# Altium PCB Waistband.PcbDoc (part 2 of 2)
Units mil, origin at the board's own origin, x right, y up, seen from the top; angles counter-clockwise.
Board outline 3000 x 2000 mil, 2 copper layers (Top Layer, Bottom Layer); 52 components, 62 nets, 323 pads, 99 vias.
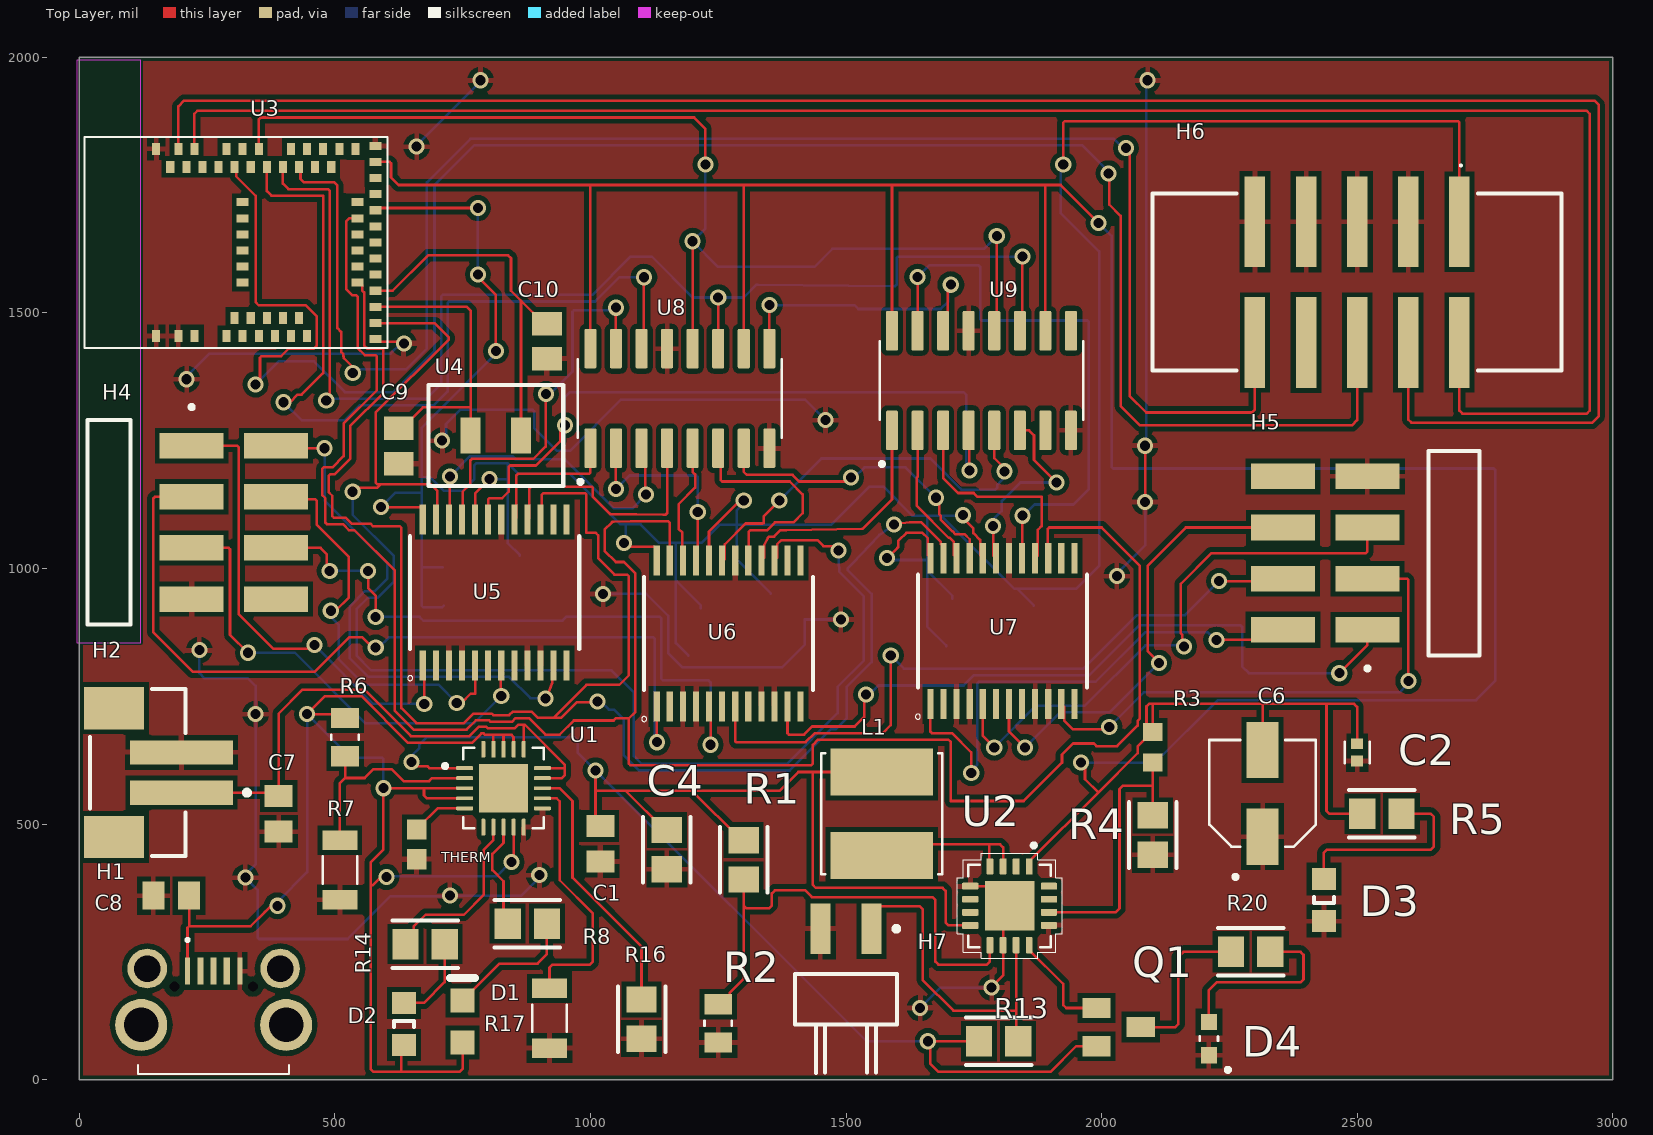
[diagram p0: Top Layer view]

## Part data (continued)
R7 R17: library part RE1206FRE07100KL, "Chip Resistor Precision Grade Thick Film 1206 100kOhm 1% Paper T/R", Case/Package=1206, Manufacturer=Yageo, Max Operating Temperature=155°C, Max Power Dissipation=250mW, Min Operating Temperature=-55°C, Resistance=100kR, Resistor Type="Thick Film", Supplier Part Number 1=13-RE1206FRE07100KLCT-ND, Temperature Coefficient=50ppm/°C, Tolerance=1%, Category="Chip SMD Resistors", ComponentLink1Description=http://www.yageo.com/NewPortal/yageodocoutput?fileName=/pdf/R-Chip/PYu-RE_105_RoHS_L_4.pdf&src-supplier=Digi-Key, ComponentLink1URL=http://www.yageo.com/NewPortal/yageodocoutput?fileName=/pdf/R-Chip/PYu-RE_105_RoHS_L_4.pdf&src-supplier=Digi-Key, Features="Moisture Resistant", Height=0.026inch, Length=0.122inch, Manufacturer Part Number=RE1206FRE07100KL, Number of Terminations=2, Packaging="Tape and Reel", Pricing 1="1=0.10000, 10=0.06800, 100=0.02750, 1000=0.01234, 2500=0.01071 (USD)", RoHS=Yes, RoHS Compliant=Yes, Stock 1=11020, Supplier 1=Digi-Key, Width=0.063inch
THERM: library part NCP18XW153J03RB, "Thermistor NTC 15K Ohm 5% 2-Pin 0603 Surface Mount Solder Pad 3987K Paper T/R", Case Code (Imperial)=0603, Case Code (Metric)=1608, Current Rating=250uA, Manufacturer=Murata, Max Operating Temperature=125°C, Max Power Dissipation=100mW, Min Operating Temperature=-40°C, Package Quantity=4000, Resistance=15kR, Resistance Tolerance=5%, Supplier Part Number 1=490-2444-1-ND, Accuracy=3%, Case/Package=0603, Category=Thermistors, ComponentLink1Description=https://datasheet.ciiva.com/11822/0900766b80a00379-11822042.pdf?src-supplier=RSComponents, ComponentLink1URL=https://datasheet.ciiva.com/11822/0900766b80a00379-11822042.pdf?src-supplier=RSComponents, ComponentLink2Description=https://datasheet.ciiva.com/2848/r44e-2848415.pdf?src-supplier=Digi-Key, ComponentLink2URL=https://datasheet.ciiva.com/2848/r44e-2848415.pdf?src-supplier=Digi-Key, ComponentLink3Description=https://datasheet.ciiva.com/2848/r44e-2848416.pdf?src-supplier=Digi-Key, ComponentLink3URL=https://datasheet.ciiva.com/2848/r44e-2848416.pdf?src-supplier=Digi-Key, ComponentLink4Description=https://datasheet.ciiva.com/2848/r44e-2848417.pdf?src-supplier=Digi-Key, ComponentLink4URL=https://datasheet.ciiva.com/2848/r44e-2848417.pdf?src-supplier=Digi-Key, ComponentLink5Description=https://datasheet.ciiva.com/18225/getdatasheetpartid-325542-18225670.pdf?src-supplier=Verical, ComponentLink5URL=https://datasheet.ciiva.com/18225/getdatasheetpartid-325542-18225670.pdf?src-supplier=Verical, Depth=0.8mm, Height=0.8mm, Lead Free="Lead Free", Length=1.6mm, Manufacturer Part Number=NCP18XW153J03RB, Mount="Surface Mount", Number of Pins=2, Packaging="Tape and Reel", Power Rating=100mW, Pricing 1="1=0.25000, 5=0.22800, 10=0.20300, 25=0.18160, 50=0.15960, 100=0.13610, 500=0.11258, 1000=0.09425 (USD)", Radiation Hardening=No, RoHS=Yes, RoHS Compliant=Yes, Series=NCP18, Stock 1=19442, Supplier 1=Digi-Key, Termination=SMD/SMT, Thickness=150um, Tolerance=5%, Width=800um
U1: "MCP73871 Series Li-Ion/Li-Pol 50 mA - 1000 mA 4.2 V Battery Charger - QFN-20", Case/Package=QFN, Manufacturer=Microchip, Max Charge Current=1A, Max Input Voltage=6V, Max Operating Temperature=85°C, Min Operating Temperature=-40°C, Min Supply Voltage=4.5V, Output Voltage=4.2V, Package Quantity=91, Supplier Part Number 1=MCP73871-2CCI/ML-ND, Category="Battery Management", ComponentLink1Description=https://datasheet.ciiva.com/16296/filehandler-aspxddocname-en536709-16296680.pdf?src-supplier=Future+Electronics, ComponentLink1URL=https://datasheet.ciiva.com/16296/filehandler-aspxddocname-en536709-16296680.pdf?src-supplier=Future+Electronics, ComponentLink2Description=https://datasheet.ciiva.com/3213/22090b-3213433.pdf?src-supplier=Avnet, ComponentLink2URL=https://datasheet.ciiva.com/3213/22090b-3213433.pdf?src-supplier=Avnet, ComponentLink3Description=https://datasheet.ciiva.com/1933/22090b-1933110.pdf?src-supplier=Digi-Key, ComponentLink3URL=https://datasheet.ciiva.com/1933/22090b-1933110.pdf?src-supplier=Digi-Key, ComponentLink4Description=https://datasheet.ciiva.com/1137/1669447-1137947.pdf?src-supplier=Element14, ComponentLink4URL=https://datasheet.ciiva.com/1137/1669447-1137947.pdf?src-supplier=Element14, ComponentLink5Description=https://datasheet.ciiva.com/15114/getdatasheetpartid-448150-15114746.pdf?src-supplier=Verical, ComponentLink5URL=https://datasheet.ciiva.com/15114/getdatasheetpartid-448150-15114746.pdf?src-supplier=Verical, Contact Plating=Tin,Matte, Height=0.95mm, Lead Free="Lead Free", Length=4mm, Manufacturer Part Number=MCP73871-2CCI/ML, Max Output Current=1A, Max Supply Voltage=6V, Mount="Surface Mount", Number of Cells=1, Number of Pins=20, Output Current=1A, Packaging=Rail/Tube, Pricing 1="1=2.19000, 25=1.82320, 100=1.68000 (USD)", Radiation Hardening=No, REACH SVHC="No SVHC", RoHS=Yes, RoHS Compliant=Yes, Supplier 1=Digi-Key, Width=4mm
U2: "Conv DC-DC 1.8V to 5.5V Synchronous Step Up Single-Out 1.8V to 5.5V 0.5A 16-Pin VQFN EP T/R", Case/Package=QFN, Manufacturer="Texas Instruments", Max Input Voltage=5.5V, Max Operating Temperature=85°C, Max Output Current=500mA, Min Input Voltage=1.8V, Min Operating Temperature=-40°C, Output Current=2A, Package Quantity=1, Quiescent Current=20uA, Supplier Part Number 1=296-15259-6-ND, Switching Frequency=600kHz, Category="Voltage Regulators - Switching", ComponentLink1Description=https://datasheet.ciiva.com/3221/tps61092-3221395.pdf?src-supplier=Avnet, ComponentLink1URL=https://datasheet.ciiva.com/3221/tps61092-3221395.pdf?src-supplier=Avnet, ComponentLink2Description=https://datasheet.ciiva.com/15113/getdatasheetpartid-188313-15113725.pdf?src-supplier=Verical, ComponentLink2URL=https://datasheet.ciiva.com/15113/getdatasheetpartid-188313-15113725.pdf?src-supplier=Verical, ComponentLink3Description=https://datasheet.ciiva.com/26901/tps61090rsar-26901797.pdf?src-supplier=IIIC, ComponentLink3URL=https://datasheet.ciiva.com/26901/tps61090rsar-26901797.pdf?src-supplier=IIIC, ComponentLink4Description=https://datasheet.ciiva.com/2025/tps61090-2025960.pdf?src-supplier=Digi-Key, ComponentLink4URL=https://datasheet.ciiva.com/2025/tps61090-2025960.pdf?src-supplier=Digi-Key, ComponentLink5Description=https://datasheet.ciiva.com/2025/tps61090-2025959.pdf?src-supplier=Digi-Key, ComponentLink5URL=https://datasheet.ciiva.com/2025/tps61090-2025959.pdf?src-supplier=Digi-Key, ComponentLink6Description=https://datasheet.ciiva.com/2025/tps61090-2025961.pdf?src-supplier=Digi-Key, ComponentLink6URL=https://datasheet.ciiva.com/2025/tps61090-2025961.pdf?src-supplier=Digi-Key, Efficiency=96%, Height=0.9mm, Lead Free="Lead Free", Length=4mm, Manufacturer Part Number=TPS61090RSAR, Max Output Voltage=5.5V, Min Output Voltage=1.8V, Mount="Surface Mount", Number of Outputs=1, Number of Pins=16, Operating Supply Voltage=5.5V, Output Configuration=Positive, Output Type=Adjustable, Output Voltage=5.5V, Packaging="Tape and Reel", Pricing 1="1=2.72000, 10=2.44700, 25=2.30800, 100=1.96650, 250=1.84652, 500=1.61570, 1000=1.52425 (USD)", Radiation Hardening=No, RoHS=Yes, RoHS Compliant=Yes, Supplier 1=Digi-Key, Synchronous Rectifier=Yes, Topology=Boost, Weight=0.001464oz, Width=4mm
U4: "Crystal 0.032768MHz ±20ppm (Tol) 9pF FUND 70000Ohm 2-Pin CSMD T/R", Case/Package=SMD/SMT, ESR (Equivalent Series Resistance)=70kR, Frequency=32.768kHz, Frequency Stability=20ppm, Load Capacitance=9pF, Manufacturer=Epson, Max Operating Temperature=85°C, Min Operating Temperature=-40°C, Package Quantity=1000, Supplier Part Number 1="FC-135 32.7680KA-AC0", Category=Uncategorized, ComponentLink1Description=http://www.mouser.com/ds/2/137/1699449-465441.pdf?src-supplier=Mouser, ComponentLink1URL=http://www.mouser.com/ds/2/137/1699449-465441.pdf?src-supplier=Mouser, ComponentLink2Description=http://components.arrow.com/part/dataview/43474691S8880657N1318?src-supplier=Arrow+Electronics, ComponentLink2URL=http://components.arrow.com/part/dataview/43474691S8880657N1318?src-supplier=Arrow+Electronics, ComponentLink3Description=https://www.verical.com/server-webapp/html/getDatasheet?partID=654709&src-supplier=Verical, ComponentLink3URL=https://www.verical.com/server-webapp/html/getDatasheet?partID=654709&src-supplier=Verical, ComponentLink4Description=https://support.epson.biz/td/api/doc_check.php?dl=brief_FC-135&lang=en&src-supplier=Digi-Key, ComponentLink4URL=https://support.epson.biz/td/api/doc_check.php?dl=brief_FC-135&lang=en&src-supplier=Digi-Key, ComponentLink5Description=https://support.epson.biz/td/api/doc_check.php?dl=brief_FC-135R_en.pdf&src-supplier=Digi-Key, ComponentLink5URL=https://support.epson.biz/td/api/doc_check.php?dl=brief_FC-135R_en.pdf&src-supplier=Digi-Key, Drive Level=0.5uW, Frequency Tolerance=20ppm, Height=0.035inch, Length=0.126inch, Manufacturer Part Number=FC13532.7680KAAC0, Mount="Surface Mount", Packaging="Tape and Reel", Radiation Hardening=No, RoHS=Yes, Series=FC-135, Supplier 1="Arrow Electronics", Termination=SMD/SMT, Tolerance=20ppm, Weight=0.000564oz, Width=0.059inch
U5 U6 U7: "DC Motor Driver 2.7V to 5.5V 24-Pin SSOP Embossed T/R", Case/Package=SSOP, Manufacturer=Toshiba, Max Operating Temperature=85°C, Max Supply Voltage=5.5V, Min Operating Temperature=-20°C, Min Supply Voltage=2.7V, Operating Supply Voltage=3V, Output Current=1A, Package Quantity=1, Category="Motor Drivers", ComponentLink1Description=https://datasheet.ciiva.com/12216/tb6612fng-datasheet-en-20141001-12216529.pdf?src-supplier=Mouser, ComponentLink1URL=https://datasheet.ciiva.com/12216/tb6612fng-datasheet-en-20141001-12216529.pdf?src-supplier=Mouser, Interface=Parallel, Logic Function="AND GATE", Manufacturer Part Number=TB6612FNG,C,8,EL, Mount="Surface Mount", Number of Outputs=2, Number of Pins=24, Packaging="Tape and Reel", Pricing 1="1=2.06000, 10=1.85400, 25=1.74880, 100=1.49010, 250=1.39920, 500=1.22430, 1000=1.01442 (USD)", RoHS=Yes, Series=-, Supplier 1=Digi-Key
U8 U9: "No Description Available", Mfr_Name="Texas Instruments", Copyright="Copyright (C) 2022 Ultra Librarian. All rights reserved.", Manufacturer_Part_Number=SN74HC595D, RefDes=RefDes, Type=DEV

## Via types
v1: diameter 31.5, hole 19.68, Top Layer to Bottom Layer, 99 vias

## Nets (pads, with @x,y where several pads share a name; then routed paths per layer and width w, separated by ;. In a path a pad name is that pad's centre, name@x,y a point inside that pad or via, vN(x,y) a via of type N, cw(c..) or ccw(c..) an arc to the next point about the centre after c; other vN are vias at no path point)
Enable_control: H7.1 R13.1 U2.11 | length 673.8
  Top Layer w5: H7.1 1550,324.53 1564.69,339.21 1604.39,339.21 1604.43,339.25 1644.14,339.25 1650,333.39 1650,195 1710,135 1832.8,135 ; U2.11 1832.8,135 ; R13.1 1832.8,79.06 1832.8,135
FB_U2: R3.1 R4.2 U2.14 | length 532.4
  Top Layer w5: U2.14 2027.2,327.2 2035,335 2035,568.31 2041.73,575.04 2100,575.04 ; R4.2@2100,530 2100,575.04 ; R3.1 2100,575.04
GND: C1.1 C2.1 C4.1 C6.1 C7.1 C8.1 C9.1 C10.1 C11.1 C12.1 C13.1 C14.1 C15.1 C16.1 C17.1 C18.1 C19.1 D3.1 D4.C H1.5 H2.2 H4.07 H5.07 H6.3 H6.5 H6.7 H6.9 H7.2 R2.1 R4.1 R7.1 R16.1 R17.1 THERM.1 U1.10 U1.11 U2.5 U2.10 U2.13 U2.17 U3.1 U3.2 U3.15 U3.33 U3.55 U5.3 U5.4 U5.9 U5.10 U5.18 U6.3 U6.4 U6.9 U6.10 U6.18 U7.3 U7.4 U7.9 U7.10 U7.18 U8.8 U8.13 U9.8 U9.13 | length 4947.4
  Top Layer w5: U3.15 584.98,1443.29 631.71,1443.29 v1(635,1440) ; U2.5 1781.61,378.39 U2.17 1807.2,327.2 1807.2,275.2 1807,275 1807.2,274.8 U2.10 1807.2,203.76 1785,181.55 v1(1785,180) ; U2.13@1883.52,300 1885.14,301.61 U2.13 ; v1(2085,1130) v1(2085,1240)
  Bottom Layer w5: v1(210,1370) 210,1375 255,1420 609.04,1420 629.04,1440 v1(635,1440) ; v1(235,840) 235,795 245,785 330,785 345,770 v1(345,715) 345,420.96 325,400.96 v1(325,395) 349.13,370.87 349.13,277.93 352.06,275 525,275 608.88,358.88 723.88,358.88 v1(725,360) 865,360 900,395 v1(900,400) ; v1(660,1825) 660,1827.5 785,1952.5 v1(785,1955) ; v1(710,1250) 717.5,1257.5 717.5,1282.5 745,1310 887.07,1310 890,1307.07 890,1275 935,1230 960,1230 1060,1330 1420,1330 v1(1460,1290) ; v1(1025,950) 1109.28,950 1151.87,907.4 1151.87,834.39 1179.44,806.82 1375.42,806.82 1419,850.39 1419,900 v1(1490,900) ; v1(1645,140) 1685,180 v1(1785,180) ; v1(2030,985) 2030,990 2085,1045 v1(2085,1130) ; v1(2085,1240) 2087.5,1242.5 2087.5,1952.5 v1(2090,1955)
LBI_U2: R1.1 R2.2 U2.9 | length 946.7
  Top Layer w5: R2.2 1257.28,147.4 1272.17,162.28 1272.17,169.57 1299.68,197.09 1299.68,340.86 ; R1.1 1299.68,340.86 ; U2.9 1781.61,230.86 1775.76,225 1680.86,225 1675,230.86 1675,351.27 1669.14,357.13 1433.45,357.13 1420.58,370 1360.86,370 1355,364.14 1355,340.86 1349.14,335 1305.54,335 1299.68,340.86
m0_in: U5.21 U8.15 | length 739.7
  Top Layer w5: U5.21 750,1096.61 750,1150 765,1165 765,1211.26 767.93,1214.19 888.19,1214.19 912.5,1238.5 912.5,1340.65 v1(913.01,1341.16) ; U8.15 v1(1050,1510)
  Bottom Layer w5: v1(913.01,1341.16) 921.16,1341.16 965,1385 965,1502.07 967.93,1505 1045,1505 v1(1050,1510)
m0_out: H4.01 U5.1 | length 937.8
  Top Layer w5: H4.01 309.06,1240 311.99,1237.07 311.99,910.7 380.19,842.5 452.5,842.5 v1(460,850) ; U5.1 672.05,802.95 675,800 v1(675,735)
  Bottom Layer w5: v1(460,850) 575,735 v1(675,735)
m1_in: U5.17 U8.1 | length 282.8
  Top Layer w5: U5.17 855,1099.25 855,1182.07 857.93,1185 997.07,1185 1000,1187.93 U8.1
m1_out: H4.02 U5.11 | length 1085.9
  Top Layer w5: H4.02 389.96,1235 v1(479.63,1235) ; v1(912.51,745.55) 913.48,745.55 913.57,745.63 925,776.43 925,810 U5.11
  Bottom Layer w5: v1(479.63,1235) 480,1234.63 480,1133.03 602.5,1010.53 602.5,979.47 578.41,955.37 559.13,955.37 529.63,925.87 529.63,824.13 565.97,787.79 841.12,787.79 882.5,746.41 911.65,746.41 v1(912.51,745.55)
m2_in: U6.21 U8.2 | length 417.3
  Top Layer w5: v1(1050,1155) U8.2 ; U6.21 1210,1018.98 v1(1210,1110)
  Bottom Layer w5: v1(1050,1155) 1076.77,1181.77 1207.07,1181.77 1210,1178.84 v1(1210,1110)
m2_out: H4.03 U6.1 | length 1671.1
  Top Layer w5: H4.03 147.93,1140 145,1137.07 145,875 222.5,797.5 460.53,797.5 528.03,865 554.04,865 574.04,845 v1(580,845) ; U6.1 1129.69,725.31 1130,725 v1(1130,660)
  Bottom Layer w5: v1(580,845) 585.96,845 605.96,865 1123.2,865 1126.13,862.07 1126.13,663.87 v1(1130,660)
m3_in: U5.22 U8.3 | length 633.1
  Top Layer w5: U5.22 725,1097.2 v1(725,1180) ; U8.3 1107.7,1227.42 1107.7,1145.6 v1(1109.03,1144.27)
  Bottom Layer w5: v1(725,1180) 763.87,1218.87 848.48,1218.87 853.48,1213.87 949.33,1213.87 1045.71,1117.5 1082.27,1117.5 v1(1109.03,1144.27)
m3_out: H4.04 U5.5 | length 810.3
  Top Layer w5: H4.04 389.96,1135 462.07,1135 465,1132.07 465,1085 527.5,1022.5 527.5,943.46 501.17,917.14 v1(492.13,917.14) ; v1(738.49,736.51) 747.48,736.51 765.96,755 774.41,755 U5.5
  Bottom Layer w5: v1(492.13,917.14) 492.13,904.96 507.86,889.22 507.86,822.14 557.5,772.5 702.5,772.5 v1(738.49,736.51)
m4_in: U5.16 U8.4 | length 493.6
  Top Layer w5: U5.16 880,1098.66 880,1155 885,1160 1002.07,1160 1005,1157.07 1005,1140 1038.54,1106.46 1142.93,1105 1147.07,1105 1148.54,1106.46 1150,1107.93 U8.4
m4_out: H4.05 U5.7 | length 927.4
  Top Layer w5: H4.05 292.07,1040 295,1037.07 295,870 v1(330,835) ; v1(825.59,750.29) 825.59,756.91 825,757.5 825,800 825.59,800.59 U5.7
  Bottom Layer w5: v1(330,835) 421.97,835 559.47,697.5 772.8,697.5 v1(825.59,750.29)
m5_in: U6.22 U8.5 | length 238.7
  Top Layer w5: U6.22 1180,1016.3 1180,1070 1172.5,1077.5 1172.5,1125.53 1205,1158.03 1205,1183.84 1200,1188.84 U8.5
m5_out: H4.06 U6.5 | length 1292.2
  Top Layer w5: H4.06 472.07,1040 484.57,1027.5 484.57,1000.43 v1(490,995) ; v1(565,995) 565,961.81 580,946.81 v1(580,905) ; U6.5 1235,727.05 v1(1235,655)
  Bottom Layer w5: v1(490,995) v1(565,995) ; v1(580,905) 665.77,905 672.96,897.82 945.39,897.82 952.57,905 1136.07,905 1139,902.07 1139,783.93 1141.93,781 1231,781 1235,777 v1(1235,655)
m6_in: U6.17 U8.6 | length 439.1
  Top Layer w5: U8.6 1250,1220 1255,1215 1255,1172.93 1257.93,1170 1390,1170 1415,1145 1415,1107.93 1397.16,1090.09 1361.13,1090.09 1346.04,1075 1312.93,1075 1310,1072.07 1310,1027.44 U6.17@1308.82,1026.26
m6_out: H5.01 U6.11 | length 1436.4
  Top Layer w5: U6.11 1385.59,677.93 1388.52,675 1417.86,675 1433.6,690.75 1517.07,690.75 1535.37,709.05 1535.37,749.13 v1(1539.37,753.13) ; v1(2465,795) 2520,850 H5.01
  Bottom Layer w5: v1(1539.37,753.13) 1545.68,753.13 1563.47,770.92 1729.92,770.92 1750.13,791.13 1976.13,791.13 2073.37,888.37 2272.07,888.37 2275,885.44 2275,807.93 2287.93,795 v1(2465,795)
m7_in: U7.21 U8.7 | length 622.4
  Top Layer w5: U8.7 1300,1188.84 1305.96,1182.87 1395.46,1182.87 1408.33,1170 1502.5,1170 v1(1510,1177.5) ; v1(1675.74,1138.2) 1682.5,1131.43 1682.5,1105.7 1685,1103.2 1685,1095.29 1707.52,1072.78 1708.37,1072.78 1714.56,1066.58 1732.49,1066.58 1742.05,1057.03 U7.21
  Bottom Layer w5: v1(1510,1177.5) 1515.96,1177.5 1535.96,1197.5 1616.43,1197.5 v1(1675.74,1138.2)
m7_out: H5.02 U7.1 | length 1025.2
  Top Layer w5: U7.1 1665,734.29 1665,680.8 1667.93,677.87 1707.13,677.87 1745,640 v1(1745,600) ; v1(2225,860.12) 2335.16,860.12 H5.02
  Bottom Layer w5: v1(1745,600) 1745,604.18 1757,616.18 1757,775.32 1759.93,778.25 1988.25,778.25 2085.5,875.5 2207.5,875.5 2222.87,860.12 v1(2225,860.12)
m8_in: U7.17 U9.15 | length 1116.9
  Top Layer w5: U9.15 v1(1640,1570) ; U7.17 1845.07,1020.66 v1(1845.07,1103.08)
  Bottom Layer w5: v1(1640,1570) 1662.76,1592.76 1759.31,1592.76 1762.24,1589.83 1762.24,1487.93 1765.17,1485 1972.07,1485 1975,1482.07 1975,1155 1945,1125 1869.11,1125 1847.18,1103.08 v1(1845.07,1103.08)
m8_out: H5.03 U7.11 | length 1035.4
  Top Layer w5: U7.11 1926.56,729.19 1926.56,702.71 1944.27,685 2005,685 2010,690 v1(2015,690) ; H5.03 2597.07,980 2600,977.07 v1(2600,780)
  Bottom Layer w5: v1(2015,690) 2082.5,757.5 2582.5,757.5 2595,770 2595,775 v1(2600,780)
m9_in: U6.16 U9.1 | length 456.4
  Top Layer w5: U6.16 1339.78,1020.81 1339.78,1045.22 1340.1,1045.88 1340.49,1046.67 ; 1340.49,1046.68 1346.65,1059.32 cw(c1351.15,1057.13) 1351.15,1062.13 1359.18,1062.13 1371.92,1074.87 1383.04,1074.87 ccw(c1383.04,1079.87) 1383.12,1074.87 1532.22,1077.22 1590,1135 U9.1
m9_out: H5.04 U6.7 | length 1374.9
  Top Layer w5: U6.7 1283.23,661.77 1285,660 1421.06,660 1438.94,677.87 1572.07,677.87 1587.5,693.3 v1(1587.5,830) ; v1(2230,975) 2350.04,975 H5.04
  Bottom Layer w5: v1(1587.5,830) 1613.5,804 1965,804 2069.43,908.43 2163.43,908.43 v1(2230,975)
m10_in: U7.22 U9.2 | length 284.3
  Top Layer w5: U9.2 1640.02,1179.1 1638.24,1177.32 1638.24,1122.67 1701,1059.9 1703.04,1059.9 1711.08,1051.86 1711.08,1025.37 U7.22
m10_out: H5.05 U7.5 | length 1112.6
  Top Layer w5: U7.5 1767.64,672.36 v1(1790,650) ; v1(2161.52,847.25) 2157.5,851.27 2157.5,870.5 2155,873 2155,970 2215,1030 2517.07,1030 2520,1032.93 H5.05
  Bottom Layer w5: v1(1790,650) 1871.12,731.12 1967,731.12 2085.47,849.6 2159.17,849.6 v1(2161.52,847.25)
m11_in: U7.16 U9.3 | length 426.5
  Top Layer w5: U9.3 1690,1176.97 1719.47,1147.5 1749.64,1147.5 1756.56,1140.58 1882.57,1140.58 1882.57,1082.84 1875.37,1075.65 1875.37,1025.37 U7.16
m11_out: H5.06 U7.7 | length 923.8
  Top Layer w5: U7.7 1818.82,681.18 v1(1850,650) ; v1(2112.5,815) 2112.5,815.96 2090,838.46 2090,1005 2165,1080 H5.06
  Bottom Layer w5: v1(1850,650) 1918.25,718.25 2015.75,718.25 v1(2112.5,815)
mcu_3v3_supply: C11.2 C12.2 C13.2 C14.2 C15.2 C16.2 C17.2 C18.2 C19.2 H6.1 U3.28 U5.20 U5.24 U6.20 U6.24 U7.20 U7.24 | length 6695.3
  Top Layer w5: U3.28 583.98,1705 v1(780,1705) ; v1(590,1120) 666.67,1120 672.05,1114.63 U5.24 ; U5.20 774.41,1146.91 v1(802.5,1175) v1@802.5,1172.5 ; v1(780,1575) 780,1570 815,1535 v1(815,1425) ; v1(1065.37,1050) 1072.91,1042.46 1110.62,1042.46 1114.76,1042.46 1124.31,1042.46 1129.69,1037.09 U6.24 ; U6.20 1232.05,1072.05 1292.5,1132.5 v1(1300,1132.5) ; v1(1580,1020) 1600.49,1039.95 1602,1041.46 1602,1053.96 1603.49,1055.45 1617.99,1069.57 1649.57,1069.57 1659.9,1059.24 1659.9,1025.37 U7.24 ; v1(1729.24,1104.08) 1729.24,1098.17 1749.27,1078.15 1749.27,1068.88 1762.26,1055.89 1762.26,1025.37 U7.20 ; v1(1925,1790) 1925,1872.07 1927.93,1875 2697.07,1875 2700,1872.07 H6.1
  Bottom Layer w5: v1(590,1120) 617.89,1147.89 670,1147.89 ; C12.2 711.09,1002.07 670,1002.07 ; C13.2 710.07,924 672.93,924 670,926.93 670,1002.07 ; v1(780,1575) v1(780,1705) ; v1(802.5,1175) 803.31,1174.2 838.25,1174.2 ; v1(815,1425) 815,1420 670,1275 670,1178 ; C11.2 862.07,1026.18 838.25,1050 838.25,1174.2 ; v1(1065.37,1050) 1069.43,1054.05 1069.43,1086 ; C16.2 1191.07,830.18 1167.28,853.98 1167.28,976.39 ; C15.2 1216.16,927.51 1167.28,976.39 ; v1(1300,1132.5) 1300,1127.49 1286.07,1113.56 1286.07,1085 ; C14.2 1353.07,951.18 1286.07,1018.19 1286.07,1085 ; v1(1580,1020) 1583.56,1016.44 1658.66,1016.44 ; C19.2 1696.07,849.18 1658.66,886.6 1658.66,996.01 ; C18.2 1708.16,946.51 1658.66,996.01 ; v1@1728.72,1109.47 1734.11,1104.08 v1(1729.24,1104.08) 1728.02,1102.86 1687.14,1102.86 ; C17.2 1867,928.18 1835.18,960 ; v1(1925,1790) 1920,1785 1920,1695 1995,1620 1995,1005 1950,960 1835.18,960 ; 670,1002.07 670,1147.89 ; 670,1147.89 670,1178 ; 670,1178 687.05,1178 713.3,1151.75 749.78,1151.75 773.03,1175 773.03,1202.03 777,1206 838.25,1206 ; 838.25,1174.2 838.25,1206 ; 838.25,1206 859.25,1185 960,1185 1059,1086 1069.43,1086 ; 1069.43,1086 1098,1086 1134,1050 1167.28,1050 ; 1167.28,976.39 1167.28,1050 ; 1167.28,1050 1217.5,1050 1252.5,1085 1286.07,1085 ; 1286.07,1085 1470.53,1085 1545.53,1160 1573.03,1160 1630.17,1102.86 1658.66,1102.86 ; 1658.66,996.01 1658.66,1016.44 ; 1658.66,1016.44 1658.66,1102.86 ; 1658.66,1102.86 1687.14,1102.86 ; 1687.14,1102.86 1830,960 1835.18,960
NetC9_2: C9.2 U3.17 U4.1 | length 595.8
  Top Layer w5: U3.17@582.78,1508.48 U3.17 758.35,1511.65 759.98,1510.02 765.79,1504.21 765.79,1315 ; C9.2 631.1,1273.9 672.2,1315 765.79,1315 ; U4.1 765.79,1315
NetC10_2: C10.2 U3.18 U4.2 | length 720.5
  Top Layer w5: U3.18 613.15,1543.15 682.5,1612.5 839.22,1612.5 844.65,1607.07 844.65,1543.15 864.21,1523.58 ; U4.2 864.21,1523.58 ; C10.2 908.9,1478.9 864.21,1523.58
NetD1_2: D1.2 R8.2 | length 262.1
  Top Layer w5: D1.2 821.95,226.95 896.67,226.95 915,245.28 R8.2
NetD2_1: D2.1 R14.2 | length 175.3
  Top Layer w5: D2.1 635.25,150.25 674.75,150.25 715,190.5 R14.2 ; R14.2@718.14,285.99 R14.2@718.14,290
NetD4_A: D4.A R20.1 | length 371.9
  Top Layer w5: D4.A 2210,175 2225,190 2389.14,190 2395,195.86 2395,244.14 2389.14,250 R20.1
NetH6_2: H6.2 U3.51 | length 3776.8
  Top Layer w5: U3.51 225,1820.98 225,1889.14 230.86,1895 2949.14,1895 2955,1889.14 2955,1308.73 2949.14,1302.87 2705.86,1302.87 2700,1308.73 H6.2
NetH6_4: H6.4 U3.53 | length 4010.5
  Top Layer w5: U3.53 193.78,1903.78 205,1915 2964.14,1915 2972.87,1906.27 2972.87,1297.87 2960,1285 2605.86,1285 2600,1290.86 H6.4
NetH6_6: H6.6 U3.47 | length 3872.6
  Top Layer w5: U3.47 306.89,1782.4 306.89,1767.14 345,1729.03 345,1520.86 351.17,1514.68 443.21,1514.68 464.25,1493.64 464.25,1435.18 458.95,1429.88 409.88,1429.88 395,1415 356.54,1415 353.61,1412.07 353.61,1368.61 v1(345,1360) ; v1(2013.55,1772.89) 2015,1771.44 2015,1711.57 2037.13,1689.44 2037.13,1317.87 2075,1280 2490,1280 2500,1290 H6.6
  Bottom Layer w5: v1(345,1360) 390,1405 459.51,1405 519.51,1345 615,1345 695,1425 695,1750 772.5,1827.5 1962.5,1827.5 2013.55,1776.45 v1(2013.55,1772.89)
NetH6_10: H6.10 U3.40 | length 3260.8
  Top Layer w5: U3.40 432.87,1782.4 432.87,1762.13 440,1755 499.14,1755 505,1749.14 505,1470 512.35,1462.65 512.35,1423.48 516.71,1419.11 516.71,1415.57 517.66,1414.62 517.66,1411.09 535.04,1393.71 v1(535.04,1382.5) ; v1(2047.5,1822.36) 2055,1814.86 2055,1337.4 2087.4,1305 2294.14,1305 2300,1310.86 H6.10
  Bottom Layer w5: v1(535.04,1382.5) 542.54,1390 640,1390 680,1430 680,1755 765.37,1840.37 2023.89,1840.37 2041.9,1822.36 v1(2047.5,1822.36)
NetLabel45: D3.2 R5.2 | length 395.2
  Top Layer w5: D3.2 2435,444.14 2440.86,450 2644.14,450 2650,455.86 2650,514.14 2644.14,520 R5.2
NetQ1_1: Q1.1 U2.12 | length 212.2
  Top Layer w5: U2.12 1858.39,253.78 1925,187.17 1925,145.86 1930.86,140 Q1.1
NetQ1_3: Q1.3 R20.2 | length 314.6
  Top Layer w5: Q1.3 2144.14,102.6 2150,108.46 2150,240 2160,250 R20.2
NetR6_1: R6.1 R7.2 U1.2 | length 421.7
  Top Layer w5: R7.2 510,580 520,590 ; R6.1 520,590 ; U1.2 690.03,589.68 684.22,583.88 634.47,583.88 610.85,607.5 575.93,607.5 558.43,590 520,590
NetR8_1: R8.1 U1.8 | length 210.8
  Top Layer w5: U1.8 830,463.06 808.2,441.26 808.2,409.8 830,388.01 830,312.2 837.2,305 R8.1
NetR14_1: R14.1 U1.7 | length 334.5
  Top Layer w5: R14.1 654.29,281.15 654.29,299.29 677.5,322.5 752.5,322.5 791.17,361.17 791.17,449.5 810.32,468.65 U1.7@810.32,484.24
pb_5v_supply: C2.2 C6.2 R3.2 R5.1 U2.1 U3.32 U8.10 U8.16 U9.10 U9.16 | length 6616.3
  Top Layer w5: U3.32 606.95,1795.12 609.88,1792.19 609.88,1764.84 624.72,1750 1000,1750 ; U8.16 1000,1750 ; U8.10 1300,1750 ; U9.16 1590,1750 ; U2.1 1858.39,426.22 1993.58,561.42 ; U9.10 1890,1750 ; v1(1960,620) 1967.5,612.5 1967.5,587.5 1993.58,561.42 ; v1(1994.22,1675.78) 1920,1750 1890,1750 ; R3.2 2100,735 ; C6.2 2315,735 ; C2.2 2500,729.14 2494.14,735 2440,735 ; R5.1 2445.86,520 2440,525.86 2440,735 ; 1000,1750 1300,1750 ; 1300,1750 1590,1750 ; 1590,1750 1890,1750 ; 1993.58,561.42 2070.53,638.37 2070.53,651.83 2083.41,664.7 2083.41,687.17 2087.87,691.63 2087.87,729.94 2092.93,735 2100,735 ; 2100,735 2315,735 ; 2315,735 2440,735
  Bottom Layer w5: v1(1960,620) 2105,620 2227.5,742.5 2732.5,742.5 2770,780 2770,1192.52 2767.07,1195.45 2022.48,1195.45 2019.55,1198.38 2019.55,1650.45 v1(1994.22,1675.78)
PROG1_TERM: R16.2 U1.13 | length 513.1
  Top Layer w5: U1.13 939.73,570 965,544.73 965,395 1100,260 R16.2
PROG3_TERM: R17.2 U1.12 | length 542.4
  Top Layer w5: U1.12 934.14,550.32 940,544.46 940,390 1005,325 1005,230.86 999.14,225 925.86,225 920,219.14 R17.2 934.96,178.27 R17.2@949.06,192.36
PWM_0: U3.16 U5.23 U6.15 | length 2806.8
  Top Layer w5: v1(535,1150) 542.5,1157.5 582.5,1157.5 590,1165 ; U3.16 579.76,1480 695,1480 722.93,1452.07 722.93,1447.93 580,1305 580,1167.93 582.93,1165 590,1165 ; U5.23 700,1097.8 700,1151.97 686.97,1165 590,1165 ; U6.15 1365.37,1020.81 1365.37,1047.29 1373.42,1055.33 1444.19,1055.33 1455.91,1043.61 1476.39,1043.61 v1(1485,1035)
  Bottom Layer w5: v1(535,1150) 535,1105 615.37,1024.63 615.37,974.13 583.74,942.5 564.47,942.5 542.5,920.53 542.5,829.47 571.31,800.66 1041.41,800.66 1085,757.07 1085,632.93 1100.43,617.5 1384.29,617.5 1483.54,716.74 1483.54,768.54 1535,820 1535,945 1486.46,993.54 v1(1485,1035)
PWM_1: U3.19 U5.15 U7.23 | length 3433.5
  Top Layer w5: U3.19 548.11,1558.9 553.48,1553.52 553.48,1543.94 557.42,1540 557.42,1436.49 563.91,1430 592.07,1430 595,1427.07 595,1343.21 530,1278.21 530,1214.13 499.69,1183.83 490.8,1183.83 487.87,1180.9 487.87,1149.22 495,1142.1 495,1102.41 497.93,1099.48 520.95,1099.48 532.93,1087.5 569.47,1087.5 574.47,1082.5 627.07,1082.5 630.37,1079.2 630.37,726.59 659.47,697.5 752.5,697.5 770.86,715.85 806.99,715.85 810.06,712.79 841.12,712.79 848.34,720 885.03,720 897.53,707.5 927.5,707.5 ; U5.15 905,1098.07 905,1144.2 907.93,1147.13 989.2,1147.13 992.13,1144.2 992.13,1069.95 1009.94,1069.95 1015,1064.89 1015,1020 1047.07,987.93 1072.07,987.93 1075,985 1075,790.66 1056.46,772.13 992.13,772.13 927.5,707.5 ; v1(1014.12,740) 1012.68,738.56 973.56,738.56 942.5,707.5 927.5,707.5 ; v1(1594.02,1085.98) 1624.87,1090 1647.35,1090 1685.49,1051.86 1685.49,1047.03 1690.87,1041.65 U7.23
  Bottom Layer w5: v1(1014.12,740) 1020.21,740 1036.29,723.92 1046.08,723.92 1065,705 1065,634.72 1095.1,604.63 1389.63,604.63 1470,685 1479.57,685 1501.87,707.3 1501.87,768.66 1550,816.79 1550,950 1504.35,995.65 1503.59,996.41 1503.59,1000.55 1511.52,1008.48 ccw(c1485,1035) 1512.24,1009.22 1563.83,1063.74 1565.58,1065.49 v1(1594.02,1085.98)
PWM_2: U3.27 U6.23 U7.15 | length 4193.8
  Top Layer w5: U3.27 527.93,1684.88 521.99,1678.94 521.99,1546.73 534.05,1534.67 541.62,1534.67 544.55,1531.74 544.55,1431.16 558.58,1417.13 579.2,1417.13 582.13,1414.2 582.13,1348.54 517.13,1283.54 517.13,1219.47 495.16,1197.5 477.93,1197.5 475,1194.57 475,1143.89 481.6,1137.29 481.6,1089.53 484.53,1086.6 515.62,1086.6 527.6,1074.63 538.41,1074.63 617.5,995.53 617.5,721.26 654.13,684.63 757.84,684.63 776.19,702.98 801.66,702.98 804.72,699.91 846.46,699.91 853.67,707.13 879.69,707.13 911.82,675 940,675 967.5,702.5 1045.53,702.5 1050.16,707.13 1074.2,707.13 1075,706.32 ; U6.23 1155.28,1089.2 1152.35,1092.13 1085.28,1092.13 ccw(c1080,1055) 1078.83,1092.48 1045.32,1091.43 ccw(c1045.47,1086.44) 1041.94,1089.97 1027.87,1075.91 1027.87,1034.47 1049.84,1012.5 1065.71,1012.5 1087.87,990.33 1087.87,719.2 1075,706.32 ; U7.15 1895,1020.59 1895,1077.07 1897.93,1080 2000,1080 2075,1005 2075,706.4 2070.53,701.93 2070.53,692.5 2030.53,652.5 1990,652.5 1985,657.5 1944.47,657.5 1922.5,635.53 1922.5,620 1847.5,545 1705,545 1705,660 1700,665 1445.13,665 1435,654.87 1435,617.93 1432.07,615 1077.93,615 1075,617.93 1075,706.32
sr_cascade: U8.9 U9.14 | length 575.4
  Top Layer w5: U8.9 v1(1350,1515) ; U9.14 1699.03,1473.91 1699.03,1549.03 v1(1705,1555)
  Bottom Layer w5: v1(1350,1515) 1516.65,1515 1524.15,1507.5 1685.23,1507.5 1700.23,1522.5 1700.23,1550.23 v1(1705,1555)
SR_SPI_SCK: U3.42 U8.11 U9.11 | length 2467.3
  Top Layer w5: U3.42 398.5,1752.93 409.31,1742.13 487.07,1742.13 490,1739.2 490,1335 v1(483.24,1328.24) ; U8.11 v1(1250,1530) ; U9.11 1845,1469.88 v1(1845,1610)
  Bottom Layer w5: v1(483.24,1328.24) 487.13,1332.13 679.25,1332.13 707.87,1360.75 707.87,1532.07 710.8,1535 1003.76,1535 1078.76,1610 1120,1610 1200,1530 v1(1250,1530) 1300,1530 1325.21,1555.21 1327.31,1555.21 1593.91,1552.17 1596.03,1552.17 1598.96,1555.1 1598.96,1607.07 1601.89,1610 v1(1845,1610)
SR_SPI_SDI: U3.43 U8.14 | length 1687
  Top Layer w5: U3.43 367.01,1737.99 375.75,1729.25 477.13,1729.25 477.13,1382.13 435,1340 427.18,1340 412.18,1325 v1(400,1325) ; U8.14 1104.63,1434.63 v1(1104.63,1569.63)
  Bottom Layer w5: v1(400,1325) 435,1290 520,1290 549.25,1319.25 694.25,1319.25 720.75,1345.75 720.75,1519.2 723.68,1522.13 1009.09,1522.13 1056.59,1569.63 v1(1104.63,1569.63)
SR_SPI_SS: U3.44 U8.12 U9.12 | length 2210.2
  Top Layer w5: U3.44 351.26,1878.39 355,1882.13 1202.87,1882.13 1225,1860 v1(1225,1790) ; U8.12 v1(1200,1640) ; U9.12 1795,1469.88 v1(1795,1650)
  Bottom Layer w5: v1(1225,1790) 1225,1665 v1(1200,1640) 1250,1590 1438.14,1590 1473.14,1625 1770,1625 v1(1795,1650)
stby_0: U5.19 U9.4 | length 1367.2
  Top Layer w5: U5.19 800,1134.57 802.93,1137.5 827.5,1137.5 840,1150 840,1198.39 842.93,1201.32 893.53,1201.32 941.39,1249.18 941.39,1271.39 v1(950,1280) ; U9.4 1741.52,1268.48 v1(1741.52,1191.52)
  Bottom Layer w5: v1(950,1280) 950,1335 960,1345 1730,1345 1735,1340 1735,1198.03 v1(1741.52,1191.52)
stby_1: U6.19 U9.5 | length 811.3
  Top Layer w5: U6.19 1259.57,1015.43 1260,1015 1263.01,1018.01 1263.01,1047.29 1303.6,1087.87 1336.05,1087.87 ccw(c1336.02,1092.87) 1339.43,1089.22 1339.43,1102.43 v1(1369.5,1132.5) v1@1369.5,1120.32 ; U9.5 1790,1215.96 1810,1195.96 v1(1810,1190)
  Bottom Layer w5: v1(1369.5,1132.5) 1452,1215 1665,1215 1725.98,1154.02 1792.07,1154.02 1795.61,1157.55 1795.61,1163.43 1810,1177.82 v1(1810,1190)
stby_2: U7.19 U9.6 | length 384.9
  Top Layer w5: v1(1787.85,1083.33) 1787.85,1025.37 U7.19 ; U9.6 1858.05,1270 1867.82,1260.23 1867.82,1212.29 v1(1911.66,1168.44)
  Bottom Layer w5: v1(1787.85,1083.33) 1787.85,1095.51 1804.53,1112.19 1804.53,1116.15 1805,1116.61 1805,1131.97 1841.12,1168.09 1911.3,1168.09 v1(1911.66,1168.44)
SW: L1.1 U2.3 U2.4 | length 336.3
  Top Layer w5: L1.1 1570,450 1580,460 1780,460 ; U2.4 1780,418.58 1780,460 ; U2.3 1807.2,454.14 1801.35,460 1780,460
THERM_TERM: THERM.2 U1.5 | length 114.4
  Top Layer w5: THERM.2 660,494.65 665.12,494.65 701.1,530.63 U1.5
VBAT: C1.2 C4.2 L1.2 Q1.2 R1.2 R13.2 U1.1 U2.8 | length 3445.4
  Top Layer w5: v1(650,621.38) 658.61,612.77 681.6,612.77 685,609.37 U1.1 ; v1(1010,605) 1010,565 ; C1.2 1010,506.1 1010,565 ; C4.2 1145.67,488.43 1069.1,565 ; R1.2 1295.67,468.43 1199.1,565 ; L1.2 1435,601.69 ; v1(1660,75) v1@1665,75 ; U2.8 1700.86,301.61 1695,307.47 1695,369.14 1689.14,375 1440.86,375 1435,380.86 1435,601.69 ; R13.2 v1@1665,75 ; Q1.2 1950.2,65.2 1900,15 1680.86,15 1665,30.86 v1@1665,75 ; 1010,565 1069.1,565 ; 1069.1,565 1199.1,565 ; 1199.1,565 1370,565 1406.69,601.69 1435,601.69
  Bottom Layer w5: v1(650,621.38) 650,633.55 665.44,648.99 665.44,655.44 680,670 969.14,670 975,664.14 975,640 v1(1010,605) 1540,75 v1(1660,75)
VBAT_SENSE: C7.2 H2.1 U1.14 U1.15 U1.16 | length 1173.8
  Top Layer w5: H2.1 383.58,561.26 C7.2 390,715.71 437.16,762.87 557.68,762.87 648.8,671.75 763.17,671.75 781.52,690.1 796.33,690.1 799.39,687.04 851.79,687.04 859,694.25 869.37,694.25 ; U1.16 869.37,694.25 ; U1.14 944.14,589.68 950,595.54 950,610 ; U1.15 949.37,609.37 950,610 ; 869.37,694.25 871.56,694.25 950,615.81 950,610
VBUS: C8.2 D1.1 D2.2 H1.1 R6.2 U1.3 U1.4 U1.9 U1.17 U1.18 U1.19 | length 3076
  Top Layer w5: H1.1 211.82,296.82 215,300 ; C8.2 215,359.84 215,300 ; v1(387.5,340) 375.32,340 363.59,328.27 363.27,328.27 335,300 215,300 ; R6.2 512.4,715 v1(445.86,715) 480.86,750 552.35,750 643.47,658.88 768.5,658.88 786.85,677.23 791,677.23 794.06,674.17 810,674.17 ; v1(600.9,396.38) 590.52,396.38 574.14,380 570,380 ; D2.2@630,72.32 630,15 ; D1.1 750,20.86 744.14,15 630,15 ; U1.4 680.27,550.32 674.41,556.17 674.41,570 ; U1.3 674.41,570 ; U1.19 810.2,646.3 810.2,673.97 810,674.17 ; U1.18 830,674.17 ; v1(845.7,425.53) 849.68,429.51 U1.9 ; U1.17 849.57,646.3 849.57,670.22 845.62,674.17 830,674.17 ; 570,380 570,20.86 575.86,15 630,15 ; 570,380 570,425 595,450 v1(595,570) 674.41,570 ; 810,674.17 830,674.17
  Bottom Layer w5: v1(387.5,340) 387.5,347.5 445.86,405.86 v1(445.86,715) 530.86,630 592.07,630 595,627.07 v1(595,570) ; v1(600.9,396.38) 602.02,397.5 816.13,397.5 844.16,425.53 v1(845.7,425.53)
pads on no net: H1.2 H1.3 H1.4 H1.MH1 H1.MH2 H1.MH3 H1.MH4 H1.MH5 H1.MH6 H2.3 H2.4 H4.08 H5.08 H6.8 U1.6 U1.20 U1.21 U2.2 U2.6 U2.7 U2.15 U2.16 U3.3 U3.4 U3.5 U3.6 U3.7 U3.8 U3.9 U3.10 U3.11 U3.12 U3.13 U3.14 U3.20 U3.21 U3.22 U3.23 U3.24 U3.25 U3.26 U3.29 U3.30 U3.31 U3.34 U3.35 U3.36 U3.37 U3.38 U3.39 U3.41 U3.45 U3.46 U3.48 U3.49 U3.50 U3.52 U3.54 U3.56 U3.57 U3.58 U3.59 U3.60 U3.61 U5.2 U5.6 U5.8 U5.12 U5.13 U5.14 U6.2 U6.6 U6.8 U6.12 U6.13 U6.14 U7.2 U7.6 U7.8 U7.12 U7.13 U7.14 U9.7 U9.9

## Polygon pours and split planes (outlines as drawn)
GND on Bottom Layer "GND_bot_L01_P-001" (solid, pour order 2): 6,1994 6,6 2994,6 2994,1995
GND on Top Layer "GND_L01_P001" (solid, pour order 1): 0,0 0,2000 3000,2000 3000,0

## Keep-outs
Top Layer:
  rectangle: -5,855 120,1994
Bottom Layer:
  rectangle: 8,813 136,1991

## Silkscreen, mask and mechanical layers (free items; w line width, h text height)
Mechanical 1:
  the board outline again, w10

## Text inside footprints (layer, text, board x,y; h text height)
U3: Mechanical 2 "No ground pad" at 62.87,1527.35 h17.72 r90; Mechanical 2 "as wide as possible" at -37.01,1492.64 h21.65 r90; Mechanical 3 "Toplayer no ground pad" at 238.07,1503.78 h11.81 r90